# EAGLE board microconnectorV2-straight (EAGLE 6.1)
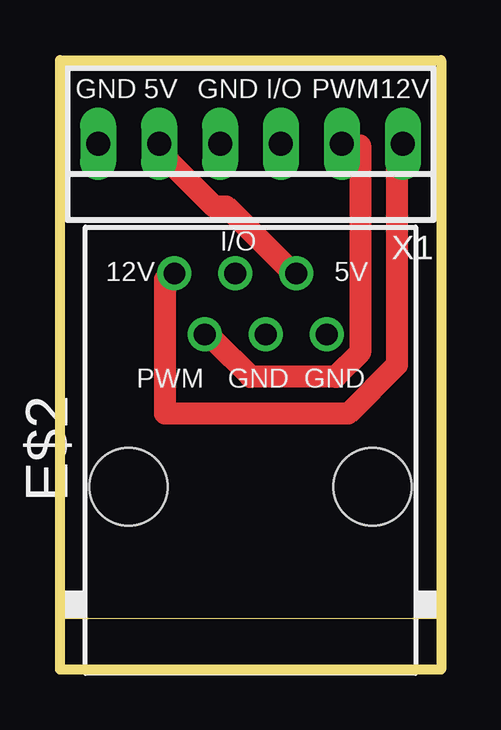
[diagram p0: board, top side]
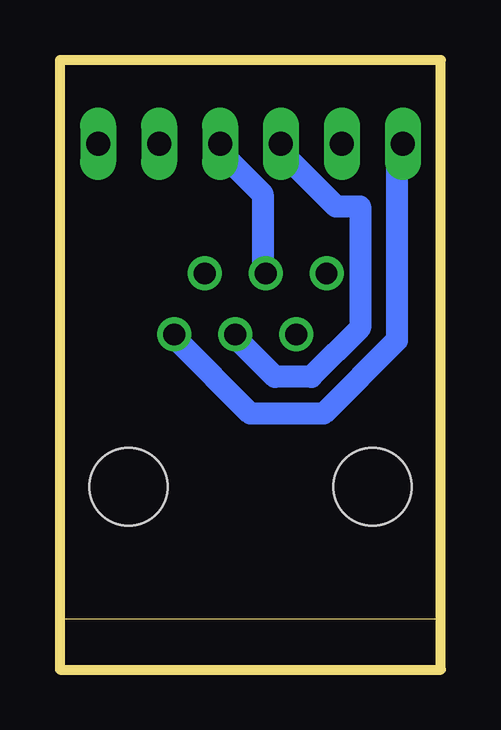
[diagram p1: board, bottom side, seen from below]

Size 15.88 x 25.4 mm. Coordinates in mm from the lower left corner, seen from the top.
Outline: 0,25.4 15.87,25.4 15.87,0 0,0 0,25.4
Copper layers (1*16): Top 0.035mm / dielectric 1.5mm / Bottom 0.035mm
Design rules: minimum track width 10mil, minimum drill 24mil, track to track 8mil, track to pad 8mil, pad to pad 8mil, via to via 8mil, smd to smd 8mil, copper to edge 40mil, drill to drill 8mil, minimum pad ring 10mil, minimum via ring 8mil, stop-mask expansion 4mil, vias tented up to drill 0mil, thermal gap 10mil
Net classes: 0 default: width 0.914 mm; 1 power: width 0.914 mm
Milling: 4 lines

## Footprints (pad centres in the part's own frame; a part is rotated, then mirrored left to right if it is on the bottom)
RJ12-STRAIGHT = drill 0.9 pad 1.4: +5V 1.905,8.89; +12V -3.175,8.89; GND1 3.175,6.35; GND2 0.635,6.35; I/O -0.635,8.89; PWM -1.905,6.35 | hole 3.251: -5.08,0; 5.08,0
22-23-2061 = drill 1 long: 1 -6.35,0; 2 -3.81,0; 3 -1.27,0; 4 1.27,0; 5 3.81,0; 6 6.35,0

## Placement (x,y rotation side)
E$2  [RJ12-STRAIGHT]  7.94,7.62 0 top
X1  [22-23-2061]  7.94,21.91 180 top

## Library data of the parts
E$2 = lpatiny
X1 = con-molex; MF: MOLEX; MPN: 22-23-2061; OC_FARNELL: 1462922; OC_NEWARK: 27C1933

## Nets
S$1: E$2.GND1 X1.6
S$2: E$2.+5V X1.5
S$3: E$2.GND2 X1.4
S$4: E$2.I/O X1.3
S$5: E$2.PWM X1.2
S$6: E$2.+12V X1.1

## Tracks (layer width: path | path; a pad name or v marks a point on that pad's centre or on a via)
S$1
  Bottom 0.914: E$2.GND1 10.99,13.72 7.94,10.67 4.89,10.67 1.84,13.72 1.84,21.84 X1.6
S$2
  Top 0.914: E$2.+5V 9.46,16.76 6.92,19.3 6.41,19.3 3.87,21.84 X1.5
S$3
  Bottom 0.914: E$2.GND2 8.45,13.72 6.92,12.19 5.4,12.19 3.37,14.22 3.37,19.3 4.38,19.3 6.92,21.84 X1.4
S$4
  Bottom 0.914: E$2.I/O 7.43,16.76 7.43,19.81 9.46,21.84 X1.3
S$5
  Top 0.914: E$2.PWM 6.41,13.72 7.94,12.19 11.49,12.19 12.51,13.21 12.51,21.84 12,21.84 X1.2
S$6
  Top 0.914: E$2.+12V 4.38,16.26 4.38,10.67 12,10.67 14.03,12.7 14.03,21.84 X1.1

## Text on the board
tPlace: GND | 5V | GND | I/O | PWM | 12V